# EAGLE board lm3410-sepic-led-driver-16mm-mk-3 (EAGLE 6.4)
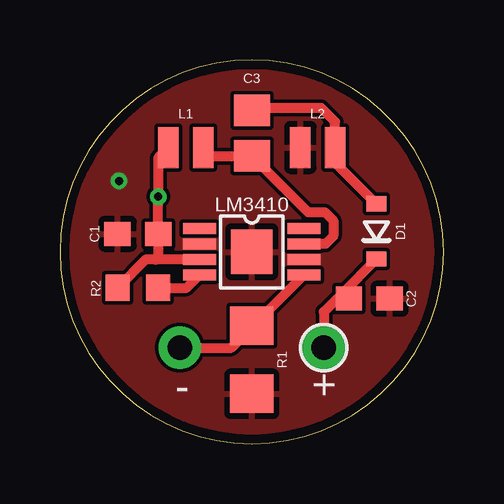
[diagram p0: board, top side]
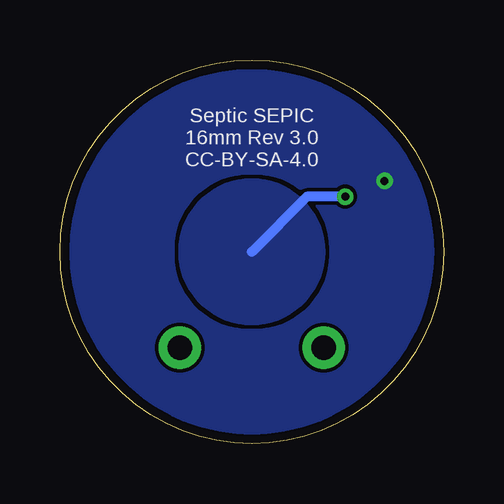
[diagram p1: board, bottom side, seen from below]

Size 16 x 16 mm. Coordinates in mm from the lower left corner, seen from the top.
Outline: 0,8 arc90 8,0 arc90 16,8 arc90 8,16 arc90 0,8
Copper layers (1*16): Top 0.0356mm / dielectric 1.5011mm / Bottom 0.0356mm
Design rules "LaenPCBOrder2": minimum track width 6mil, minimum drill 13mil, track to track 6mil, track to pad 6mil, pad to pad 6mil, via to via 6mil, smd to smd 6mil, copper to edge 15mil, drill to drill 6mil, minimum pad ring 7mil, minimum via ring 7mil, stop-mask expansion 3mil, vias tented up to drill 20mil, thermal gap 10mil

## Footprints (pad centres in the part's own frame; a part is rotated, then mirrored left to right if it is on the bottom)
1X01-KIT = drill 1.016 pad 1.778: 1 0,0
1X01NS-KIT = drill 1.016 pad 1.778: 1 0,0
C0603 = smd 1.1 x 1: 1 -0.85,0; 2 0.85,0
C0805 = smd 1.3 x 1.5: 1 -0.95,0; 2 0.95,0
SOD-323 = smd 0.63 x 0.83: A 1.15,0; C -1.15,0
1X01_NOSILK_NOSTOP = drill 0.33: P$1 0,0
INDUCTOR_2X1.6MM = smd 0.85 x 1.7: P$1 -0.725,0; P$2 0.725,0
SOP65P490X110-9N-A = smd 1.372 x 0.457: 1 -2.184,0.965; 2 -2.184,0.33; 3 -2.184,-0.33; 4 -2.184,-0.965; 5 2.184,-0.965; 6 2.184,-0.33; 7 2.184,0.33; 8 2.184,0.965 | smd 1.727 x 1.854: 9 0,0
R1206 = smd 1.6 x 1.803: 1 -1.422,0; 2 1.422,0
R0603 = smd 1 x 1.1: 1 -0.85,0; 2 0.85,0

## Placement (x,y rotation side)
+  M01PTH-KIT  [1X01-KIT]  11,4 0 top
-  M01NOSILK-KIT  [1X01NS-KIT]  5,4 0 top
C1  10uF  [C0603]  3.25,8.75 180 top
C2  10uF  [C0603]  12.9,6.05 0 top
C3  2.2uF  [C0805]  8,12.95 90 top
D1  BAT20J  [SOD-323]  13.2,8.85 90 top
JBATT+  M01NOT-A-VIA-NOPE  [1X01_NOSILK_NOSTOP]  4.1,10.3 0 top
JBATT-  M01NOT-A-VIA-NOPE  [1X01_NOSILK_NOSTOP]  2.46,10.95 0 top
L1  4.7uH  [INDUCTOR_2X1.6MM]  5.25,12.35 0 top
L2  4.7uH  [INDUCTOR_2X1.6MM]  10.75,12.35 180 top
LM3410  LM3410XMYA  [SOP65P490X110-9N-A]  8,8 0 top
R1  0.68  [R1206]  8,3.5 90 top
R2  100k  [R0603]  3.25,6.5 0 top

## Library data of the parts
+ - C1-C3 JBATT+ JBATT- L1 L2 LM3410 R1 R2 = A_butts
D1 = A_butts; PROD_ID: DIO-11623

## Nets
GND: C1.2 C2.2 JBATT-.P$1 L2.P$2 LM3410.2 LM3410.6 LM3410.9 R1.1
LED_ANODE: +.1 C2.1 D1.C
LED_CATHODE: -.1 LM3410.5 R1.2
N$1: C3.2 D1.A L2.P$1
N$2: LM3410.4 R2.2
SW: C3.1 L1.P$2 LM3410.7
VCC: C1.1 JBATT+.P$1 L1.P$1 LM3410.3 R2.1

## Tracks (layer width: path | path; a pad name or v marks a point on that pad's centre or on a via)
GND
  pour Bottom (rank 6): 8,0 arc-90 0,8 arc-90 8,16 arc-90 16,8 arc-90
  pour Top (rank 6): 8,0 arc-90 0,8 arc-90 8,16 arc-90 16,8 arc-90
LED_ANODE
  Top 0.406: D1.C 11.75,6.25 | 11.75,6.25 11,5.5 +.1 | C2.1 11.85,6.25 11.75,6.25
LED_CATHODE
  Top 0.406: -.1 7.15,4 8.03,4.88 | 8.03,4.88 LM3410.5 | R1.2 8,4.9 8.03,4.88
N$1
  Top 0.406: C3.2 8.1,14 10.9,14 11.47,13.43 L2.P$1 11.47,11.72 D1.A
N$2
  Top 0.406: R2.2 5.28,6.5 LM3410.4
SW
  Top 0.406: LM3410.7 11.08,8.33 11.4,8.65 11.4,9.3 11.05,9.65 10.35,9.65 C3.1 6.33,12 L1.P$2
VCC
  Top 0.406: LM3410.3 4,7.67 | 4,7.67 3.57,7.67 R2.1 | 4,7.67 4.1,7.77 C1.1 JBATT+.P$1 4.1,11.93 L1.P$1
  Bottom 0.406: JBATT+.P$1 5.7,10.3 8,8
  pour Bottom: 5,8 arc90 8,5 arc90 11,8 arc90 8,11 arc90

## Text on the board
bPlace: Septic SEPIC / 16mm Rev 3.0 / CC-BY-SA-4.0